# Altium PCB PCB.PcbDoc
Units mil, origin at the board's own origin, x right, y up, seen from the top; angles counter-clockwise.
Board outline 3935 x 2660 mil, 4 copper layers (TOP, GND, VCC, BOT), stack 23.756 mil thick; 87 components, 42 nets, 224 pads, 308 vias.
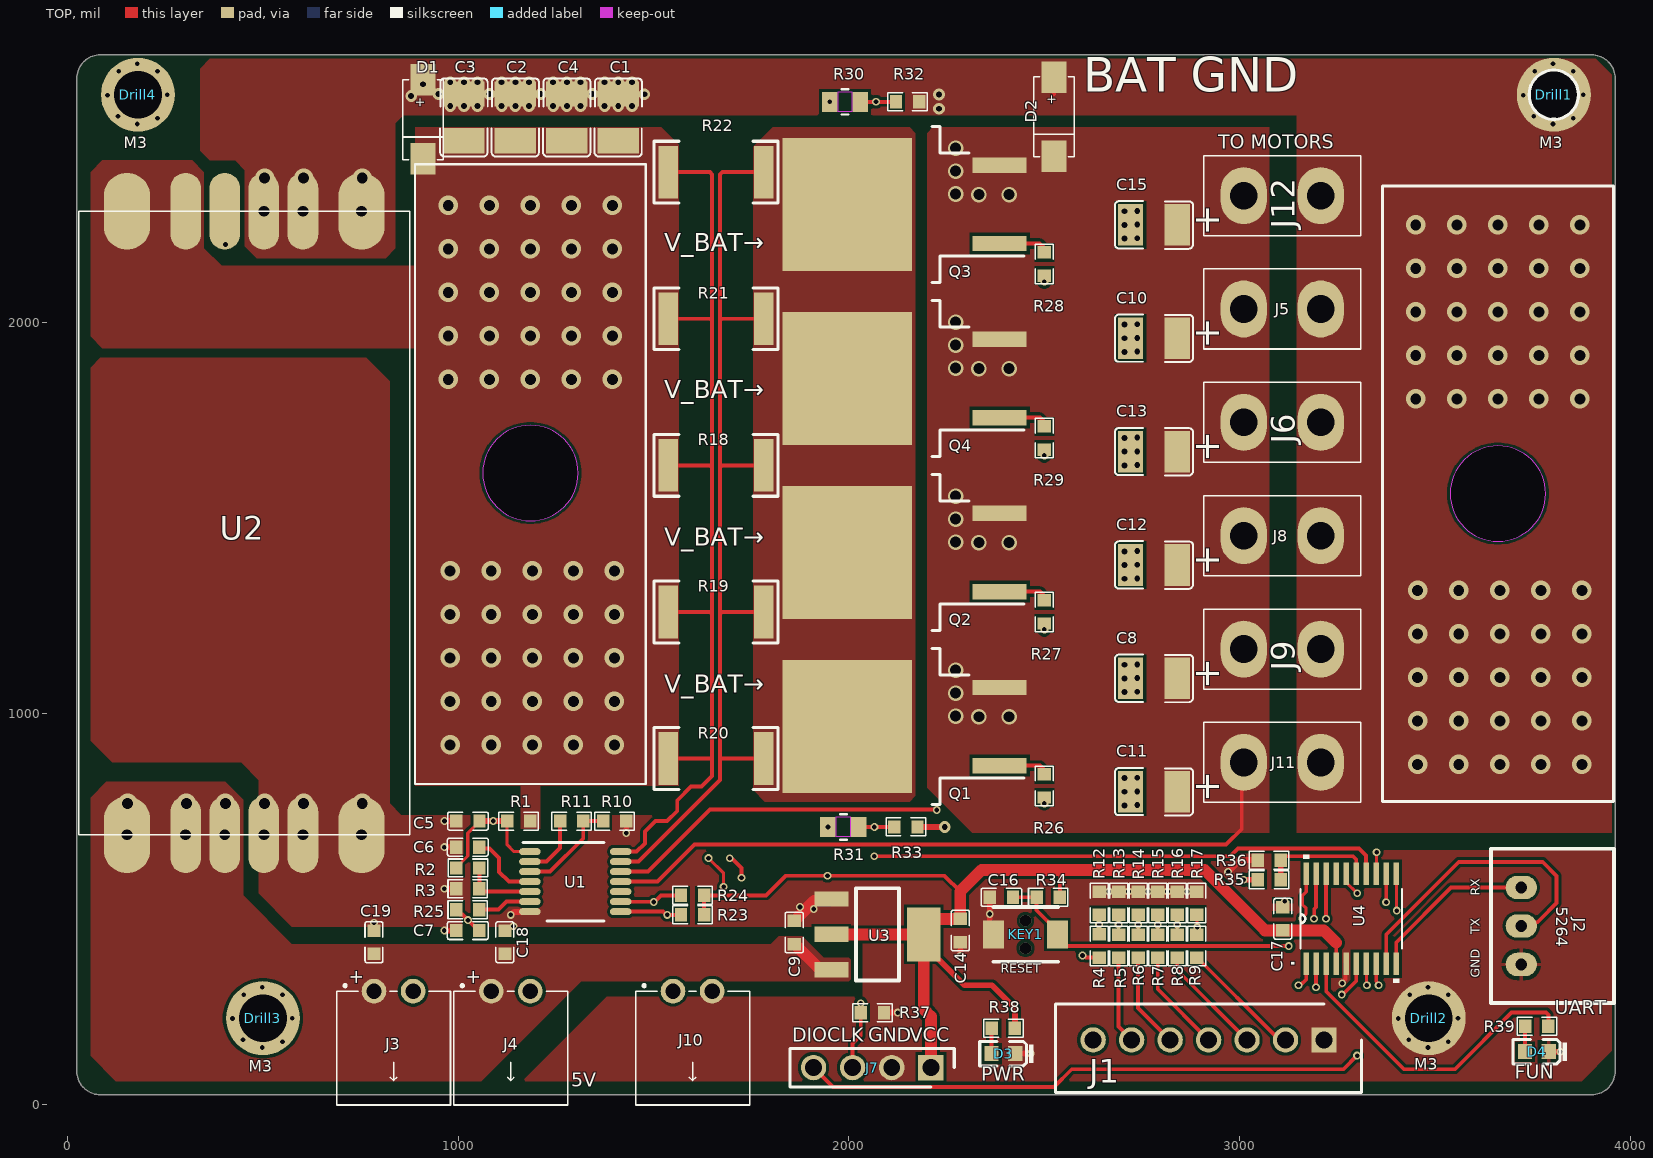
[diagram p0: TOP view]
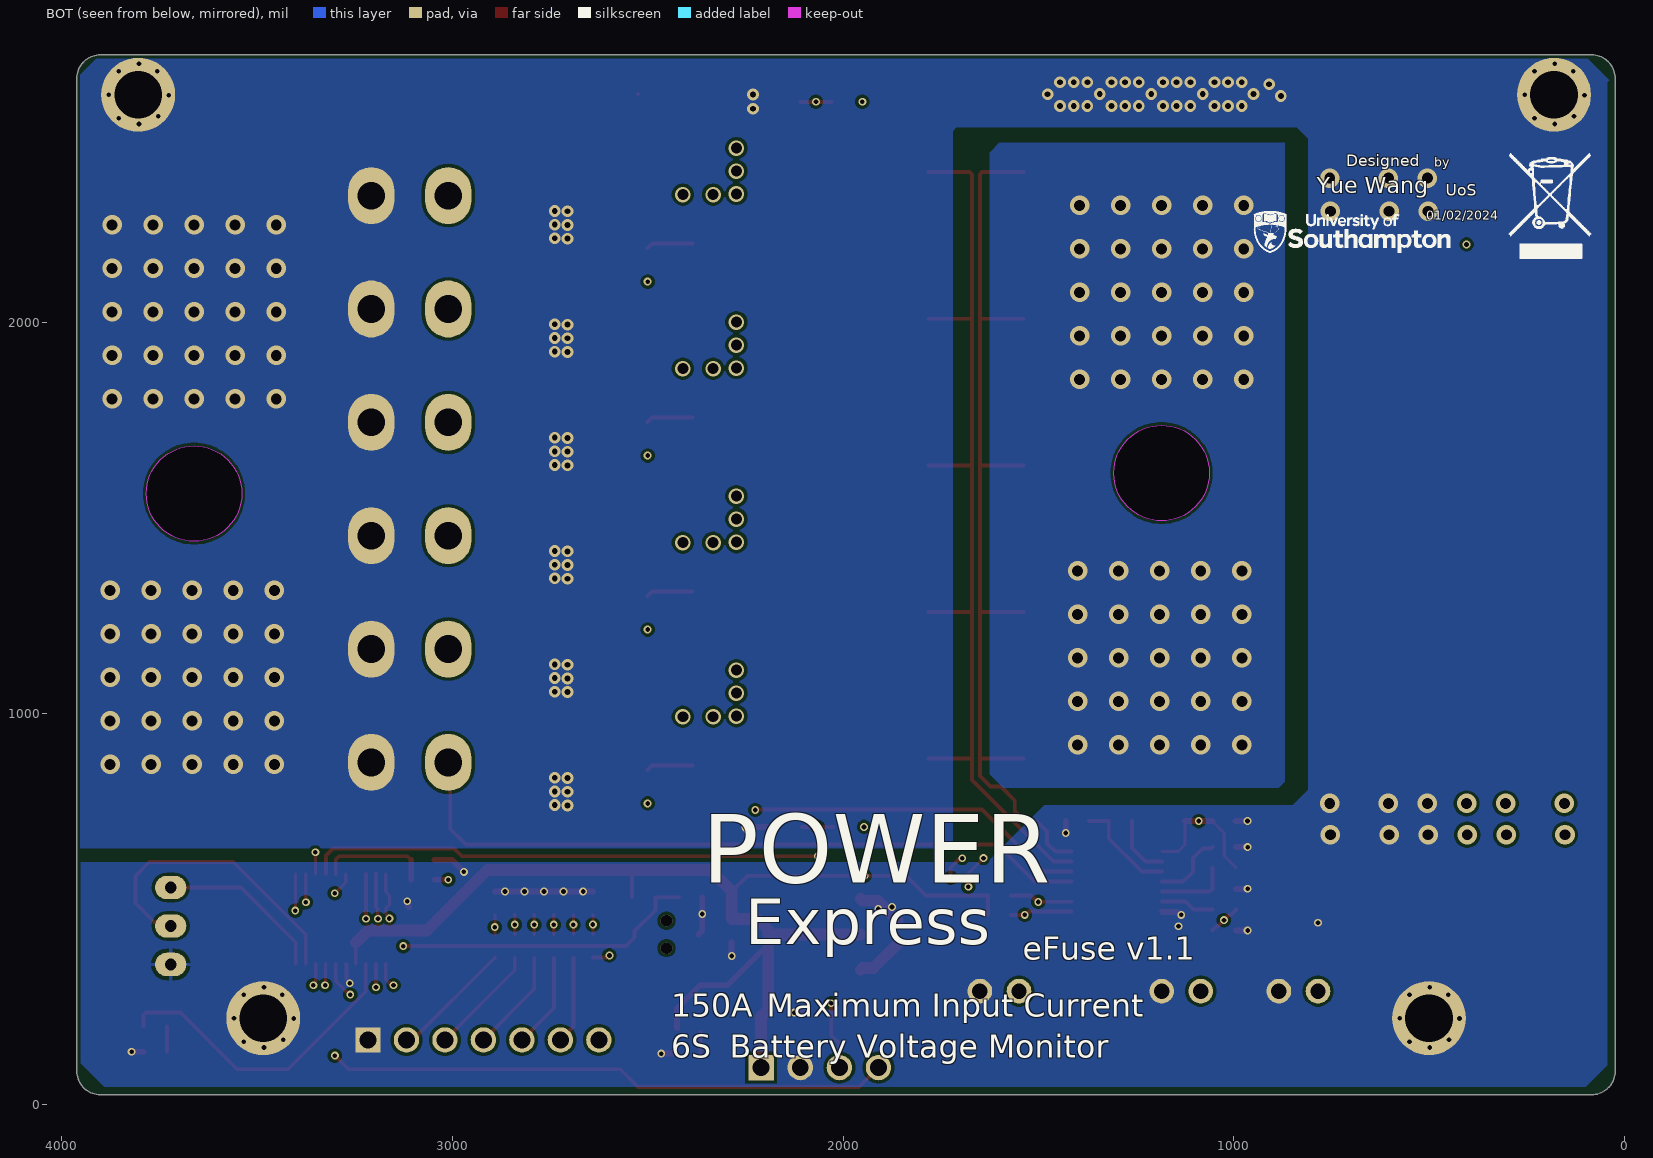
[diagram p1: BOT view, seen from below]
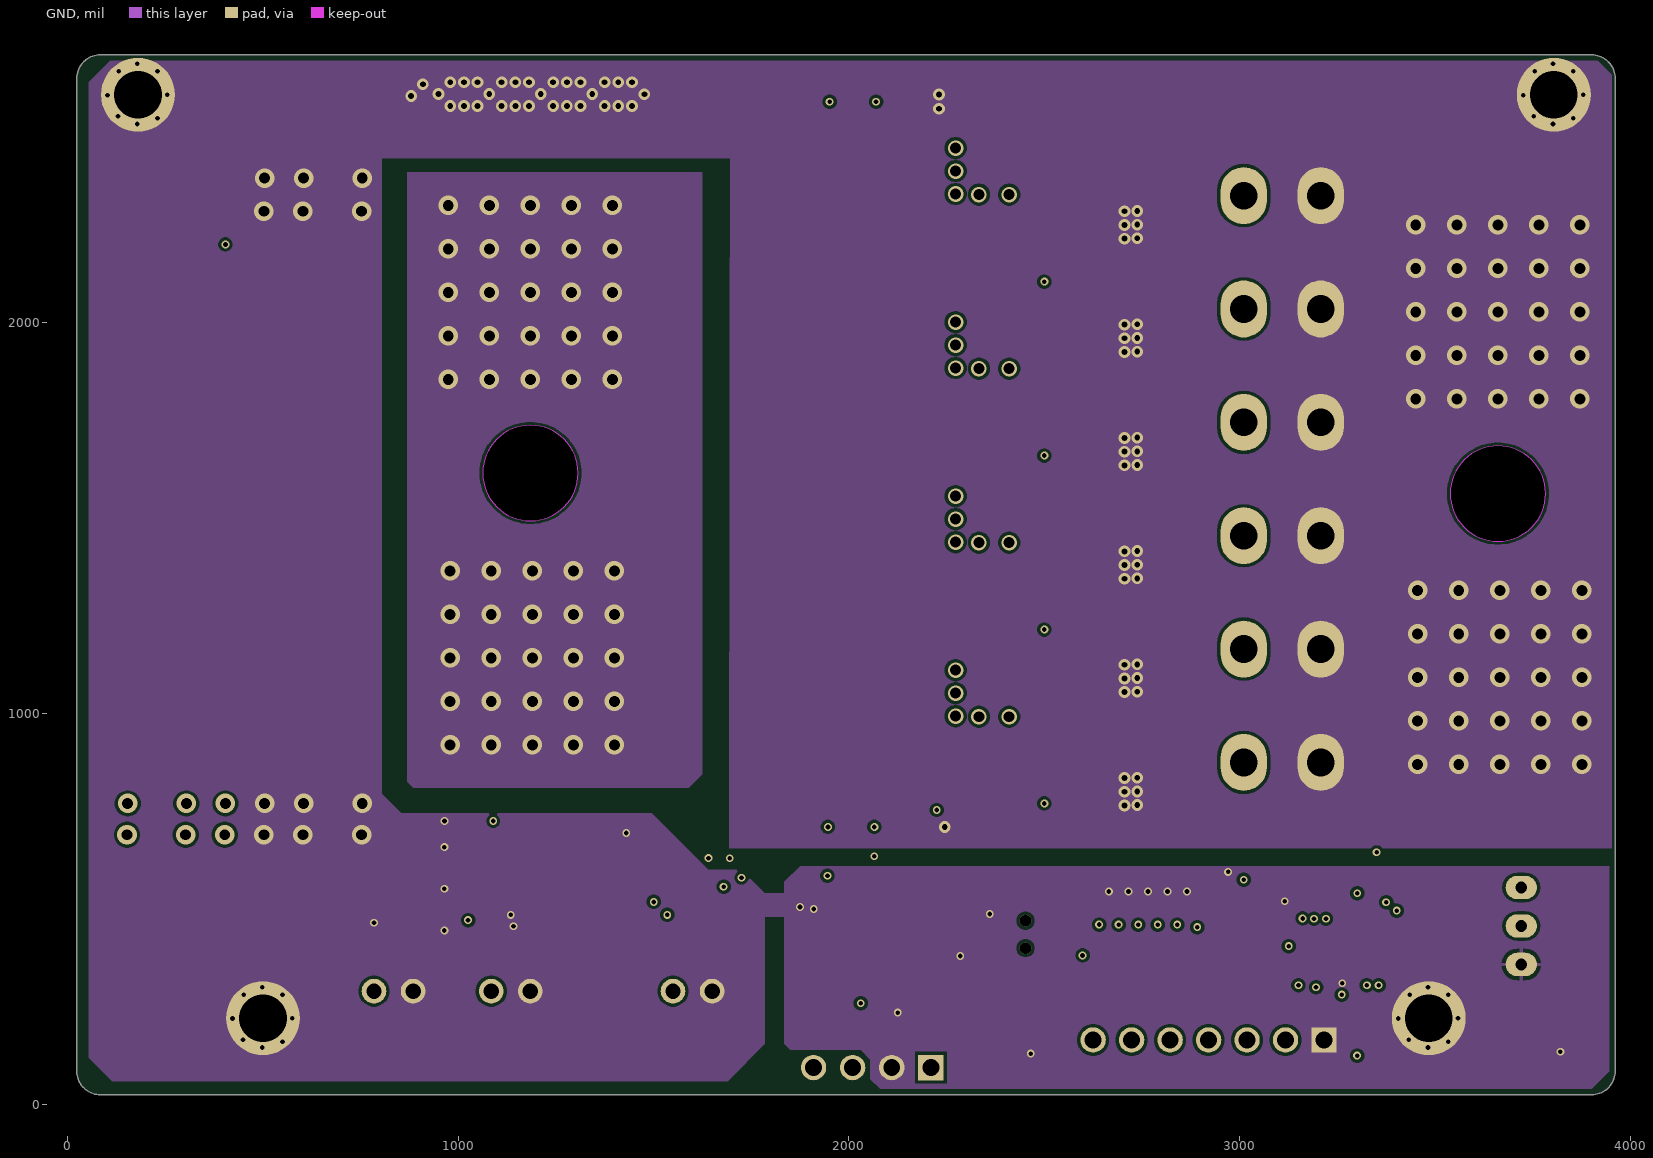
[diagram p2: GND]
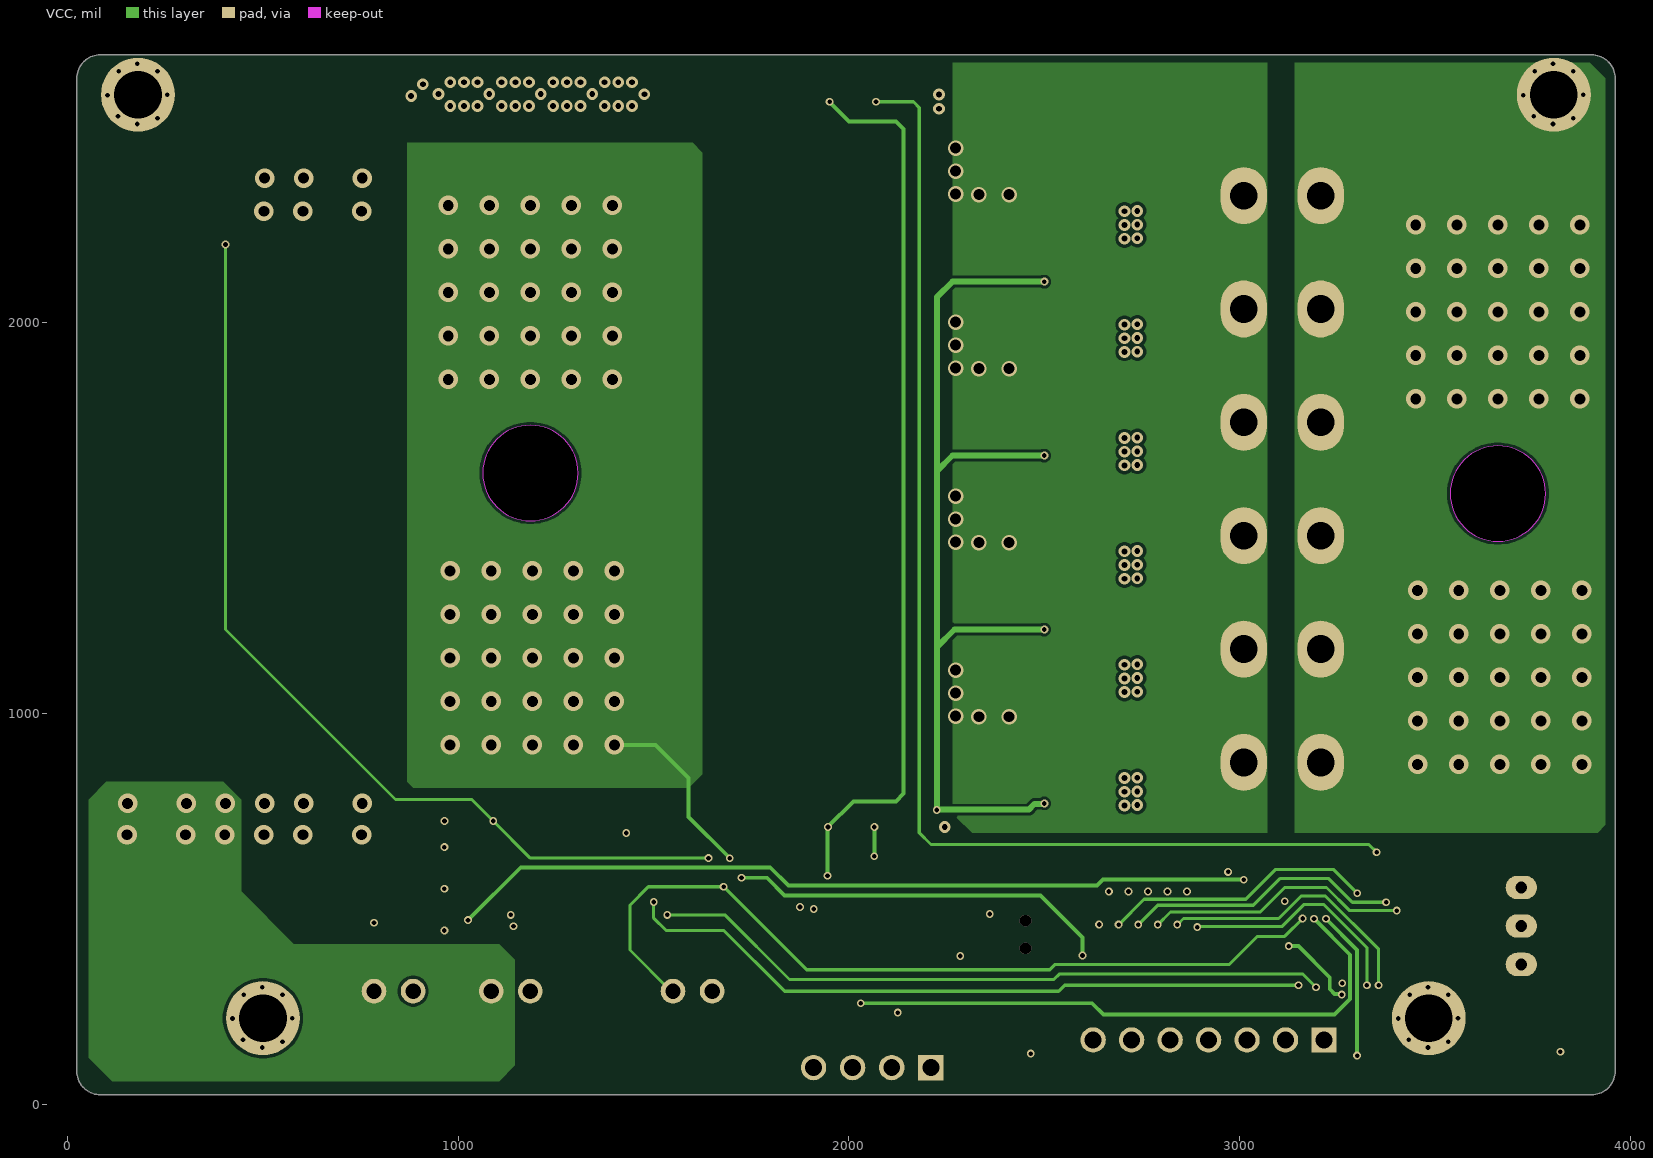
[diagram p3: VCC]
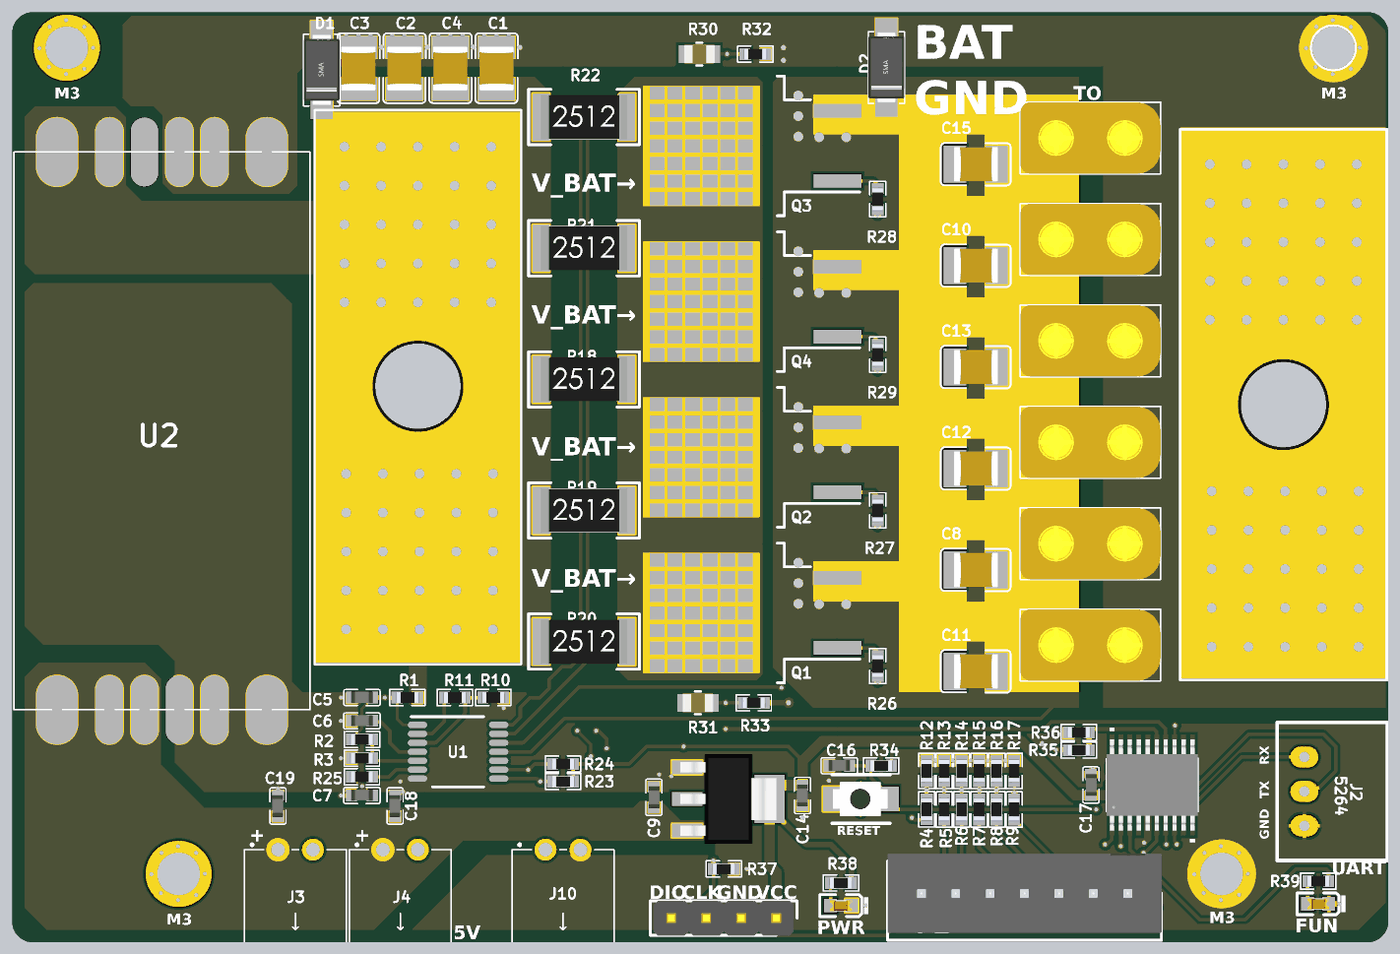
[diagram p4: 3D render of the assembled board from above, using the file's embedded part models]

## Layer stack, top to bottom
Top Solder: solder mask 0.4, Solder Resist, Dk 3.5
TOP: signal copper 1.4
Dielectric 2: prepreg 2.8, PP-006, Dk 4.1
GND: signal copper 1.378
Dielectric 1: dielectric 12.6, FR-4, Dk 4.8
VCC: signal copper 1.378
Dielectric 3: prepreg 2.8, PP-006, Dk 4.1
BOT: signal copper 1.4
Bottom Solder: solder mask 0.4, Solder Resist, Dk 3.5

## Board outline
25,84.24 25,2625 cw(c84.62,2625.38) 84.24,2685 3900,2685 cw(c3900.38,2625.38) 3960,2625.76 3960,85 cw(c3900.38,84.62) 3900.76,25 85,25 cw(c84.62,84.62)
cut-out: 3538.23,1562.66 ccw(c3660.28,1562.66) 3660.28,1440.61 ccw(c3660.28,1562.66) 3782.32,1562.66 ccw(c3660.28,1562.66) 3660.28,1684.71 ccw(c3660.28,1562.66)
cut-out: 1063.23,1615.28 ccw(c1185.28,1615.28) 1185.28,1493.23 ccw(c1185.28,1615.28) 1307.32,1615.28 ccw(c1185.28,1615.28) 1185.28,1737.32 ccw(c1185.28,1615.28)

## Design rules (kind name [scope] priority, off if disabled: settings)
BoardOutlineClearance [All] p1: gap=7.87 ignorepadtopadclearanceinfootprint=FALSE except(15.75: Arc-SplitBarrior Arc-SplitContinuation Track-SplitBarrior Track-SplitContinuation SMDPad-SplitBarrior SMDPad-SplitContinuation THPad-SplitBarrior THPad-SplitContinuation Via-SplitBarrior Via-SplitContinuation Fill-SplitBarrior Fill-SplitContinuation Poly-SplitBarrior Poly-SplitContinuation Region-SplitBarrior Region-SplitContinuation Text-SplitBarrior Text-SplitContinuation)
Clearance "Clearance Bottom Layer" [OnLayer('Bottom Layer')] p1: gap=8 ignorepadtopadclearanceinfootprint=TRUE except(10: Arc-Text Track-Text SMDPad-Text THPad-Text Via-Text Fill-Text Poly-Text Region-Text Text-Text)
Clearance "Clearance Top Layer" [OnLayer('Top Layer')] p2: gap=8 ignorepadtopadclearanceinfootprint=TRUE except(10: Arc-Text Track-Text SMDPad-Text THPad-Text Via-Text Fill-Text Poly-Text Region-Text Text-Text)
Clearance [All] p3: gap=7.87 ignorepadtopadclearanceinfootprint=FALSE except(3.5: Arc-Arc Arc-Track Arc-SMDPad Track-Track Track-SMDPad SMDPad-SMDPad; 5: Arc-Via Track-Via SMDPad-Via THPad-Via Via-Via; 10: Arc-Text Track-Text SMDPad-Text THPad-Text Via-Text Fill-Text Poly-Text Region-Text Text-Text)
HoleSize [All] p1: absolutevalues=TRUE maxlimit=248.03 minlimit=7.87 maxpercent=80.000 minpercent=20.000
MinimumAnnularRing [All] p1: minimumring=3
MinimumSolderMaskSliver [All] p1: minsoldermaskwidth=3.94
PlaneClearance [All] p1: clearance=50
PlaneConnect [All] p1: planeconnectstyle=Direct reliefexpansion=20 reliefentries=4 reliefconductorwidth=10 reliefairgap=10
PolygonConnect PolygonConnect_1 [All] p1: connectstyle=Direct reliefconductorwidth=30 reliefentries=4 polygonreliefangle="90 Angle" airgapwidth=10
RoutingCorners [All] p1: cornerstyle=Round minsetback=100 maxsetback=100
RoutingVias [All] p1: holewidth=19.68 width=39.37 viastyle="Through Hole" minholewidth=7.87 minwidth=17.72 maxholewidth=39.37 maxwidth=78.74
SilkToSilkClearance [All] p1: silktosilkclearance=3.94
SilkToSolderMaskClearance [IsPad] p1: minsilkscreentomaskgap=3.94 clearancetoexposedcopper=TRUE
SolderMaskExpansion [All] p1: expansion=4 istentingtop=FALSE
Width [All] p1: maxlimit=100 minlimit=3.5 preferedwidth=15
23 further rules are at their usual default settings.

## Classes and differential pairs
component class PMU: a C1 C2 C3 C4 C5 C6 C7 C8 C9 C10 C11 C12 C13 C14 C15 D1 D2 J1 Q1 Q2 Q3 Q4 R1 R2 R3 R4 R5 R6 R7 R8 R9 R10 R11 R12 R13 R14 R15 R16 R17 R18 R19 R20 R21 R22 R23 R24 R25 R26 R27 R28 R29 R30 R31 R32 R33 U1 U2 U3
component class MCU: a C16 C17 C18 C19 D3 D4 Drill1 Drill2 Drill3 Drill4 J2 J3 J4 J5 J6 J7 J8 J9 J10 J11 J12 KEY1 R34 R35 R36 R37 R38 R39 U4

## Components (designator, comment, footprint, x,y, rotation, side; value= is the part's Value field where it differs from the comment)
C1 "22uF" C1210 1410,2525 r270 top
C2 "22uF" C1210 1146.67,2525 r270 top
C3 "22uF" C1210 1015,2525 r270 top
C4 "22uF" C1210 1278.33,2525 r270 top
C5 "0.1uF" C0603 1025.33,725 r0 top
C6 "330pF" C0603 1025,658.33 r0 top
C7 "1.5nF" C0603 1025,445 r0 top
C8 "10uF" C1210 2780.28,1090 r0 top
C9 "1uF" C0603 1860,440 r270 top
C10 "10uF" C1210 2780.28,1960 r0 top
C11 "10uF" C1210 2780.28,800 r0 top
C12 "10uF" C1210 2780.28,1380 r0 top
C13 "10uF" C1210 2780.28,1670 r0 top
C14 "1uF" C0603 2285,445 r90 top
C15 "10uF" C1210 2780.28,2250 r0 top
C16 "0.1uF" C0603 2390,530 r0 top
C17 "0.1uF" C0603 3110,475 r270 top
C18 "0.1uF" C0603 1120,415 r90 top
C19 "0.1uF" C0603 785,415 r90 top
D1 "5.0SMDJ28A" SMA(DO-214AC) 910,2520 r90 top
D2 "MBRS3100T3G" SMA(DO-214AC) 2525,2526.93 r90 top
D3 "红灯 0603" 0603_LED_S1 2395,130 r180 top
D4 "红灯 0603" 0603_LED_S1 3759.69,135 r180 top
Drill1 "Drill_M3" Drill_M_3 3803.2,2583.05 r270 top
Drill2 "Drill_M3" Drill_M_3 3483.32,220.84 r270 top
Drill3 "Drill_M3" Drill_M_3 501.04,220.84 r270 top
Drill4 "Drill_M3" Drill_M_3 181.16,2583.05 r270 top locked
J1 "B7B-XH-A__LF__SN_" SHDR7W64P0X250_1X7_1990X575X700P 3215.28,165 r180 top
J2 "5263-3AW" 5264-3AW 3723.65,456.57 r270 top
J3 "XH_2.54mm_1x2P" XH2.54mm1x2P弯插 835,290 r0 top
J4 "XH_2.54mm_1x2P" XH2.54mm1x2P弯插 1135,290 r0 top
J5 "XT30UPB" XT30UPB 3010,2035 r90 top
J6 "XT30UPB" XT30UPB 3010,1745 r90 top
J7 "Header1x4" "Header 1x4p" 2209.48,94.4 r180 top
J8 "XT30UPB" XT30UPB 3010,1455 r90 top
J9 "XT30UPB" XT30UPB 3010,1165 r90 top
J10 "XH_2.54mm_1x2P" XH2.54mm1x2P弯插 1600,290 r0 top
J11 "XT30UPB" XT30UPB 3010,875 r90 top
J12 "XT30UPB" XT30UPB 3010,2325 r90 top
KEY1 "KEY_3*4" KEY_3*4 2370,435 r0 top
Q1 "CSD19536KTT" KTT0002A 2143.15,966.81 r180 top
Q2 "CSD19536KTT" KTT0002A 2143.15,1412.01 r180 top
Q3 "CSD19536KTT" KTT0002A 2143.15,2302.4 r180 top
Q4 "CSD19536KTT" KTT0002A 2143.15,1857.2 r180 top
R1 "178kΩ" R0603 1155.33,725 r0 top
R2 "5.49kΩ" R0603 1025,605 r180 top
R3 "10kΩ" R0603 1025,551.67 r0 top
R4 "68.1kΩ" R0603 2640,405.33 r270 top
R5 "68.1kΩ" R0603 2690,405 r270 top
R6 "68.1kΩ" R0603 2740,405 r270 top
R7 "68.1kΩ" R0603 2790,405 r270 top
R8 "68.1kΩ" R0603 2840,405 r270 top
R9 "68.1kΩ" R0603 2890,405 r270 top
R10 "28kΩ" R0603 1400.67,725 r180 top
R11 "56kΩ" R0603 1290.67,725 r180 top
R12 "10kΩ" R0603 2640,515 r270 top
R13 "10kΩ" R0603 2690,515 r270 top
R14 "10kΩ" R0603 2740,515 r270 top
R15 "10kΩ" R0603 2790,515 r270 top
R16 "10kΩ" R0603 2840,515 r270 top
R17 "10kΩ" R0603 2890,515 r270 top
R18 "1mΩ" 2512_R 1660,1635 r0 top
R19 "1mΩ" 2512_R 1660,1260 r0 top
R20 "1mΩ" 2512_R 1660,885 r0 top
R21 "1mΩ" 2512_R 1660,2010 r0 top
R22 "1mΩ" 2512_R 1660,2385 r0 top
R23 "470kΩ" R0603 1600,485 r180 top
R24 "470kΩ" R0603 1600,535 r180 top
R25 "1kΩ" R0603 1025,498.33 r0 top
R26 "10Ω" R0603 2500,815 r270 top
R27 "10Ω" R0603 2500,1260 r270 top
R28 "10Ω" R0603 2500,2150 r270 top
R29 "10Ω" R0603 2500,1705 r270 top
R30 "NTCS0805E3103JMT" NTCS0805_VIS 1990,2565 r180 top
R31 "NTCS0805E3103JMT" NTCS0805_VIS 1985.63,710 r180 top
R32 "10kΩ" R0603 2150,2565 r0 top
R33 "10kΩ" R0603 2145.63,710 r0 top
R34 "10k" R0603 2510,530 r0 top
R35 "10k" R0603 3075,575 r180 top
R36 "10k" R0603 3075,625 r0 top
R37 "10k" R0603 2060,235 r180 top
R38 "10k" R0603 2395,195 r180 top
R39 "10k" R0603 3759.69,200 r180 top
U1 "TPS2492PW" PW0014A_N 1300,570 r0 top
U2 "TPS5450_module" TPS5450_module 460,1505 r270 top
U3 "AMS1117-3.3" SOT-223 2073.11,437 r0 top
U4 "STM32C011F6P6" TSSOP20_STM 3285,475 r90 top

## Footprints (in the part's own frame and the unit in brackets; to place one, negate y for a bottom-side part, rotate by r counter-clockwise, add the part's x,y. Pads: shape width x height; smd on the part's side, far side on the other; paste and mask are expansions set on the pad)
0603_LED_S1 [mm]
  rect 0.93x0.98 smd: A(0.77,0) K(-0.77,0)
  silkscreen extent -1.98,-0.79 1.54,0.79, body extent -0.8,-0.4 0.8,0.4, height 0.6
2512_R [mm]
  rect 1.25x3.42 smd: 1(-3.1,0) 2(3.1,0)
  silkscreen extent -4.03,-2.01 4.02,2.01, body extent -3.16,-1.6 3.16,1.6, height 0.62
5264-3AW [mil]
  oval 60x80 hole 30: 1(-98.43,-3.65) 2(0,-3.65) 3(98.43,-3.65)
  silkscreen extent -197,-81 197,234
C0603 [mil]
  rect 31.73x34.02 smd mask+2.01: 1(-29.67,0) 2(29.67,0)
  silkscreen extent -52,-23 52,23, body extent -31,-15 31,16, height 18
C1210 [mm]
  rect 1.635x2.7 smd mask+0.051: 1(-1.517,0) 2(1.517,0)
  silkscreen extent -2.54,-1.55 2.54,1.55, body extent -1.57,-1.26 1.63,1.26, height 0.92
Drill_M_3 [mm]
  round 4.8 hole 3.1: 0(0,0)
"Header 1x4p" [mm]
  rect 1.65x1.65 hole 1.1: 1(0,0)
  round 1.65 hole 1.1: 2(2.54,0) 3(5.08,0) 4(7.62,0)
  silkscreen extent -1.52,-1.25 9.14,1.25, body extent -1.28,-1.27 8.9,1.27, height 8.6
KEY_3*4 [mm]
  rect 1.35x1.8 smd: 1(0,0) 2(4.15,0)
  silkscreen extent 0,-1.77 4.19,1.78, body extent 0.03,-1.25 4.03,1.25, height 1.6
KTT0002A [mm]
  rect 3.5x1 smd paste+0 mask+0.051: 1(-6.15,2.54) 3(-6.15,-2.54)
  rect 8.4x8.65 smd paste-4.2 mask+0.051: 2(3.75,0)
  silkscreen extent -7.75,-5.07 -1.78,5.07
NTCS0805_VIS [mm]
  rect 1x1.3 smd paste+0 mask+0: 1(-1,0) 2(1,0)
  TOP keep-out region: -0.449,-0.648 -0.449,0.648 0.449,0.648 0.449,-0.648
  silkscreen extent -0.22,-0.83 0.22,0.83, body extent -1.1,-0.7 1.1,0.7, height 0.94
PW0014A_N [mm]
  oval 1.4x0.45 smd paste+0 mask+0: 1(-2.95,1.95) 2(-2.95,1.3) 3(-2.95,0.65) 4(-2.95,0) 5(-2.95,-0.65) 6(-2.95,-1.3) 7(-2.95,-1.95) 8(2.95,-1.95) 9(2.95,-1.3) 10(2.95,-0.65) 11(2.95,0) 12(2.95,0.65) 13(2.95,1.3) 14(2.95,1.95)
  silkscreen extent -3.4,-2.55 1.85,2.55
R0603 [mil]
  rect 31.73x34.02 smd mask+2.01: 1(-29.67,0) 2(29.67,0)
  silkscreen extent -51,-23 50,23, body extent -37,-16 37,16, height 18
SHDR7W64P0X250_1X7_1990X575X700P [mm]
  rect 1.65x1.65 hole 1.1: 1(0,0)
  round 1.65 hole 1.1: 2(2.5,0) 3(5,0) 4(7.5,0) 5(10,0) 6(12.5,0) 7(15,0)
  silkscreen extent -2.45,-2.35 17.45,3.4, body extent -2.45,-2.88 17.45,2.88, height 7
SMA(DO-214AC) [mm]
  rect 2.046x1.62 smd mask+0.051: 1(-2.565,0) 2(2.565,0)
  silkscreen extent -2.62,-1.31 2.59,1.31, body extent -2.6,-1.3 2.6,1.3, height 2.1
SOT-223 [mm]
  rect 2.2x1 smd: 1(-3,2.249) 2(-3,-0.051) 3(-3,-2.351)
  rect 2.2x3.5 smd: 2(3,-0.051)
  silkscreen extent -1.4,-3.05 1.4,2.95, body extent -3.49,-3.29 3.49,3.19, height 1.64
TPS5450_module [mm]
  oval 5x3 smd mask+0.051: 1(-19.812,-7.792) 2(-19.812,7.448) 2(20.701,7.448) 4(20.701,-7.792)
  oval 5x2 smd mask+0.051: 1(-19.812,-3.982) 2(-19.812,1.098) 2(-19.812,3.638) 2(20.701,1.098) 2(20.701,3.638) 3(-19.812,-1.442) 4(20.701,-3.982) 4(20.701,-1.442)
  silkscreen extent -19.81,-10.92 20.69,10.58
TSSOP20_STM [mil]
  rect 58x14 smd paste-29 mask-29: 1(-115,115.16) 2(-115,89.57) 3(-115,63.98) 4(-115,38.39) 5(-115,12.8) 6(-115,-12.8) 7(-115,-38.39) 8(-115,-63.98) 9(-115,-89.57) 10(-115,-115.16) 11(115,-115.16) 12(115,-89.57) 13(115,-63.98) 14(115,-38.39) 15(115,-12.8) 16(115,12.8) 17(115,38.39) 18(115,63.98) 19(115,89.57) 20(115,115.16)
  silkscreen extent -164,-130 164,130, body extent -130,-130 130,130, height 47
XH2.54mm1x2P弯插 [mm]
  round 1.6 hole 1.001 mask+0.051: 1(-1.27,0) 2(1.27,0)
  silkscreen extent -3.7,-7.4 3.7,0.43, body extent -3.75,-7.39 3.75,0.33, height 5.9
XT30UPB [mm]
  oval 3.7x3 hole 1.8: 1(0,0) 2(0,-5)
  silkscreen extent -2.6,-7.6 2.6,2.6, body extent -2.6,-7.6 2.6,2.6, height 10.66

## Part data
C1 C2 C3 C4 C8 C9 C10 C11 C12 C13 C14 C15: library part Capacitor, "VJ1210Y104MXCAT"
C5 C6 C7 C16 C17 C18 C19: library part Capacitor
D1: library part Diode_Schottky
D2: library part Diode_Schottky, "Schottky Diodes & Rectifiers 3A 100V"
D3 D4: library part "0603 红灯", "发光二极管", Package=0603, SuppliersPartNumber=C2286, ComponentLink1Description=供应商链接, ComponentLink1URL=http://www.szlcsc.com/product/details_2659.html, Supplier=LC
J1: "Connector", Arrow Part Number="B7B-XH-A (LF)(SN)", Manufacturer_Name="JST (JAPAN SOLDERLESS TERMINALS)", Arrow Price/Stock=https://www.arrow.com/en/products/b7b-xh-a-lf-sn/jst-manufacturing, Datasheet Link=https://www.jst.com/wp-content/uploads/2021/01/eXH-new.pdf, Height=7mm, Manufacturer_Part_Number="B7B-XH-A (LF)(SN)"
J5 J6 J8 J9 J11 J12: "https://item.taobao.com/item.htm?abbucket=12&id=607162270928&ns=1&priceTId=2147810917158194959275132&sku_properties=1627207:45770027"
KEY1: "C707339"
Q1 Q2 Q3 Q4: library part NMOSFET, "100-V N-Channel NexFET™ Power MOSFET"
R1 R2 R3 R4 R5 R6 R7 R8 R9 R10 R11 R12 R13 R14 R15 R16 R17 R23 R24 R25 R26 R27 R28 R29 R32 R33 R34 R35 R36 R37 R38 R39: library part Resistor
R18 R19 R20 R21 R22: library part Resistor, "CHSA2512R0010F"
R30 R31: library part CMP-02404-000004-2, "THERMISTOR NTC 10KOHM 3570K 0805", Case Code (Imperial)=0805, Case Code (Metric)=2012, Max Operating Temperature=150°C, Max Power Dissipation=210mW, Min Operating Temperature=-40°C, Resistance=10kΩ, Tolerance=5%, Accuracy=3%, Case/Package=0805, Contact Plating=Tin, Depth=1.25mm, Height=950µm, Lead Free="Lead Free", Length=2mm, Mount="Surface Mount", NexarPartId=39723061, Number of Pins=2, Packaging="Cut Tape (CT)", Power Rating=210mW, Radiation Hardening=No, REACH SVHC=Unknown, RoHS=Compliant, Schedule B="8533400080, 8533400080", Termination=SMD/SMT
U1: "The TPS2492 and TPS2493 are easy-to-use, positive high voltage, 14-pin Hotswap Controllers that safely drive an external N-channel FET to control load current. The programmable power foldback protection ensures that the external FET operates inside its safe operating area (SOA) during overload conditions by controlling of power dissipation. The programmable current limit and fault timer ensure the supply, external FET, and load are not harmed by overcurrent. Features include inrush current limiting, controlled load turn-on, interfacing to down-stream DC-to-DC converters, and power feed protection. /  / The analog current monitor output provides a signal ready for sampling with an external A/D converter. /  / Additional features include programmable overvoltage and undervoltage shutdown, power-good for coordinating loads with inrush, and a fault indicator to indicate an over-current shutdown."
U2: "https://item.taobao.com/item.htm?id=678523742086&spm=a1z0d.6639537&sku_properties=1627207:1665065280"
U3: "C347222"
U4: "No Description Available", Mfr_Name=STMicroelectronics, Copyright="Copyright (C) 2024 Ultra Librarian. All rights reserved.", Manufacturer_Part_Number=STM32C011F6P6, RefDes=RefDes, Type=DEV

## Via types
v1: diameter 50, hole 28, TOP to BOT, tented both sides, 118 vias
v2: diameter 20, hole 12, TOP to BOT, tented both sides, 98 vias
v3: diameter 30, hole 15, TOP to BOT, tented both sides, 70 vias
v4: diameter 40, hole 28, TOP to BOT, tented both sides, 20 vias
v5: diameter 29.53, hole 29.53, TOP to BOT, tented both sides, 2 vias

## Nets (pads, with @x,y where several pads share a name; then routed paths per layer and width w, separated by ;. In a path a pad name is that pad's centre, name@x,y a point inside that pad or via, vN(x,y) a via of type N, cw(c..) or ccw(c..) an arc to the next point about the centre after c; other vN are vias at no path point)
+5: C9.2 C18.1 C19.1 J3.1 J4.1 U2.4 U3.3 | length 122.3
  TOP w30: C9.2 1861.14,410.33 1922.34,349.13 1950.31,349.13 U3.3
  other v1: 153.23,690 303.23,690 403.23,690 155,770 305,770 405,770
ADC_IN0: R9.1 R17.2 U4.7 | length 706.9
  TOP w8: R9.1 2890.85,435.52 v2(2890.85,453.65) 2890.85,484.48 R17.2 ; U4.7 3324.19,359.19 3324.19,305.81 v2(3325,305)
  VCC w8: v2(2890.85,453.65) 2892.2,455 3107.25,455 3163.38,511.13 3215.37,511.13 3325,401.5 v2(3325,305)
ADC_IN1: R8.1 R16.2 U4.8 | length 802.2
  TOP w8: R8.1 v2(2840,460) R16.2 ; U4.8 3348.98,314.27 3355,308.25 v2(3355,305)
  VCC w8: v2(2840,460) 2855.93,475.93 3099.17,475.93 3156.65,533.4 3218.85,533.4 3355,397.26 v2(3355,305)
ADC_IN2: R7.1 R15.2 U4.11 | length 820.2
  TOP w8: R7.1 v2(2790,460) R15.2 ; U4.11 3400.7,589.46 3400.7,496.51 v2(3401.24,495.97)
  VCC w8: v2(2790,460) 2822.47,492.47 3052.47,492.47 3115,555 3221.87,555 3280.9,495.97 v2(3401.24,495.97)
ADC_IN3: R6.1 R14.2 U4.12 | length 831.4
  TOP w8: R6.1 v2(2740,460) R14.2 ; v2(3374.23,517.41) 3374.4,517.58 3374.4,589.83 U4.12
  VCC w8: v2(2740,460) 2789.68,509.68 3034.32,509.68 3102.42,577.78 3227.62,577.78 3287.98,517.41 v2(3374.23,517.41)
ADC_IN4: R5.1 R13.2 U4.16 | length 806.5
  TOP w8: R5.1 v2(2690,460) R13.2 ; U4.16 3272.2,568 3300.03,540.17 v2(3300.33,540.17)
  VCC w8: v2(2690,460) 2754.87,524.87 3015.32,524.87 3091.82,601.37 3239.13,601.37 v2(3300.33,540.17)
ADC_IN5: R4.1 R12.2 | length 50.3
  TOP w8: R4.1 R12.2
  other v2: 2640,460.17
ADC_TEMP1: R30.1 R32.1 U4.13 | length 3298
  TOP w8: U4.13 3349.49,590.51 3349.49,644.49 v2(3350,645)
  TOP w10: R30.1 v2(2069.41,2565) R32.1@2109.45,2565
  VCC w8: v2(2069.41,2565) 2165,2565 2180,2550 2180,695 2210,665 3330,665 v2(3350,645)
ADC_TEMP2: R31.1 R33.1 U4.14 | length 1475.9
  TOP w10: R31.1 v2(2065.04,710) R33.1@2105.08,710 ; v2(2065,635) 2975,635 2995,655 3304.79,655 3323.09,636.7 3323.09,590.3 U4.14
  VCC w10: v2(2065,635) v2(2065.04,710)
eFuse_ENA: C5.2 J10.1 R1.1 R2.2 U1.1 U2.3 U4.20 | length 5170.6
  TOP w8: R2.2 995.33,606.14 1025,635.81 1025,693.86 1055,723.86 C5.2 ; R1.1 1125.67,664.33 1143.23,646.77 U1.1 ; v2(1640.9,630.22) 1679.53,591.59 v2(1679.53,557.08) ; v2(3160.56,475.88) 3160.56,479.13 3169.53,488.1 3169.53,501.88 3160,511.41 3160,534.25 3169.84,544.09 U4.20
  TOP w15: C5.2 v2(1090.33,725) R1.1
  VCC w8: v2(405,2200) 405,1215 840,780 1035.33,780 v2(1090.33,725) 1185.12,630.22 v2(1640.9,630.22) ; J10.1 1545,290 1440,395 1440,510 1487.08,557.08 v2(1679.53,557.08) 1892.08,344.53 2513.72,344.53 2527.62,358.43 2973.43,358.43 3045,430 3114.67,430 v2(3160.56,475.88)
FLT_N: R24.2 U1.9 U4.1 | length 2002.4
  TOP w10: U1.9 1416.46,518.5 1500.2,518.5 v2(1500.52,518.17) 1502.23,518.17 1519.05,535 R24.2 ; v2(3150,305) 3151.91,306.91 3156.91,306.91 3169.84,319.84 U4.1
  VCC w8: v2(1500.52,518.17) 1500.52,476.82 1532.34,445 1679.98,445 1835.45,289.53 2536.5,289.53 2551.97,305 v2(3150,305)
GND: C1.1 C2.1 C3.1 C4.1 C5.1 C6.1 C7.1 C8.1 C9.1 C10.1 C11.1 C12.1 C13.1 C14.1 C15.1 C16.1 C17.1 C18.2 C19.2 D1.2 D2.2 D3.K D4.K Drill1.0 Drill2.0 Drill3.0 Drill4.0 J1.1 J2.3 J3.2 J4.2 J5.2 J6.2 J7.2 J8.2 J9.2 J10.2 J11.2 J12.2 KEY1.1 R3.1 R10.1 R12.1 R13.1 R14.1 R15.1 R16.1 R17.1 R32.2 R33.2 R36.1 R37.1 U1.7 U2.2 U3.1 U4.5 | length 1029.2
  TOP w10: v2(3261.93,309.96) 3261.93,312.66 3270.2,320.93 3270.2,358 U4.5
  TOP w15: v2(965,445) C7.1 ; v2(965,551.67) R3.1 ; v2(965,658.33) C6.1 ; v2(965.33,725) C5.1 ; v2(1135,485) 1136.35,485 1144.06,492.71 1183.34,492.71 U1.7 ; v2(1430.33,694.67) R10.1 ; R37.1 v2(2125,235) ; R33.2@2186.18,710 v3(2245,710) ; v2(2285,380) C14.1 ; C16.1 2360.33,444.67 KEY1.1 ; D3.K v2(2465,130) ; R12.1 R13.1 R14.1 R15.1 R16.1 R17.1 ; v2(2970,595) 3000,625 R36.1 ; C17.1 3114.04,508.71 3114.04,519.04 v2(3115,520) ; D4.K v2(3820,135)
  TOP w30: C9.1@1860.87,470.53 1862.01,470.53 1862.01,471.67 1911.2,520.87 1950.31,520.87 U3.1
  other v1: 503.23,690 603.23,690 753.23,690 505,770 605,770 755,770 3455,870 3560,870 3665,870 3770,870 3875,870 3455,981.25 3560,981.25 3665,981.25 3770,981.25 3875,981.25 3455,1092.5 3560,1092.5 3665,1092.5 3770,1092.5 3875,1092.5 3455,1203.75 3560,1203.75 3665,1203.75 3770,1203.75 3875,1203.75 3455,1315 3560,1315 3665,1315 3770,1315 3875,1315 3450,1805 3555,1805 3660,1805 3765,1805 3870,1805 3450,1916.25 3555,1916.25 3660,1916.25 3765,1916.25 3870,1916.25 3450,2027.5 3555,2027.5 3660,2027.5 3765,2027.5 3870,2027.5 3450,2138.75 3555,2138.75 3660,2138.75 3765,2138.75 3870,2138.75 3450,2250 3555,2250 3660,2250 3765,2250 3870,2250 503.23,2285 603.23,2285 753.23,2285 505,2370 605,2370 755,2370
  other v2: 499.04,145.84 3481.32,145.84 551.04,160.84 3533.32,160.84 450.04,165.84 3432.32,165.84 423.04,219.84 3405.32,219.84 576.04,220.84 3558.32,220.84 452.04,280.84 551.04,280.84 3434.32,280.84 3533.32,280.84 499.04,299.84 3481.32,299.84 1141.92,455.83 785,465 2360.33,487.33 1910,500 1875,505 2665,544.67 2715,544.67 2765,544.67 2815,544.67 2865,544.67 179.16,2508.05 3801.2,2508.05 231.16,2523.05 3853.2,2523.05 130.16,2528.05 3752.2,2528.05 103.16,2582.05 3725.2,2582.05 256.16,2583.05 3878.2,2583.05 132.16,2643.05 231.16,2643.05 3754.2,2643.05 3853.2,2643.05 179.16,2662.05 3801.2,2662.05
  other v3: 2705,765 2737.71,765.82 2705,800 2737.71,800.82 2705,835 2737.71,835.82 2705,1055 2737.71,1055.82 2705,1090 2737.71,1090.82 2705,1125 2737.71,1125.82 2705,1345 2737.71,1345.82 2705,1380 2737.71,1380.82 2705,1415 2737.71,1415.82 2705,1635 2737.71,1635.82 2705,1670 2737.71,1670.82 2705,1705 2737.71,1705.82 2705,1925 2737.71,1925.82 2705,1960 2737.71,1960.82 2705,1995 2737.71,1995.82 2705,2215 2737.71,2215.82 2705,2250 2737.71,2250.82 2705,2285 2737.71,2285.82 2230.55,2547.23 980,2554.45 1015,2554.45 1050,2554.45 1111.67,2554.45 1146.67,2554.45 1181.67,2554.45 1243.33,2554.45 1278.33,2554.45 1313.33,2554.45 1375,2554.45 1410,2554.45 1445,2554.45 880,2580 2230.4,2583.49 1476.67,2584.45 950,2585 1080,2585 1211.67,2585 1343.33,2585 910,2610 980,2615 1015,2615 1050,2615 1111.67,2615 1146.67,2615 1181.67,2615 1243.33,2615 1278.33,2615 1313.33,2615 1375,2615 1410,2615 1445,2615
IMON: C7.2 R25.1 R35.2 | length 2183.6
  TOP w10: R25.1 995.33,497.19 1006.2,486.33 1011.1,486.33 1040.42,457.01 1043.8,457.01 1054.67,446.14 C7.2
  TOP w15: v2(3010,575) R35.2
  VCC w10: v2(1025.76,471.67) 1160.48,606.39 1798.61,606.39 1845,560 2635,560 2650,575 v2(3010,575)
NetC6_2: C6.2 U1.4 | length 186.3
  TOP w10: C6.2 1058,655 1080,655 1105,630 1105,595 1130,570 U1.4
NetC16_2: C16.2 KEY1.2 R34.1 U4.6 | length 1087
  TOP w10: C16.2 R34.1 2480.33,496.91 2533.39,443.86 KEY1.2 2533.39,426.57 2554.96,405 v2(3125,405) ; v2(3260.53,281.05) 3263.23,281.05 3297.8,315.61 U4.6
  VCC w10: v2(3125,405) 3150,405 3230,325 3230,295 3242.04,282.96 3258.61,282.96 v2(3260.53,281.05)
NetD3_A: D3.A R38.2 | length 65
  TOP w10: D3.A@2365,120.33 R38.2@2365,185.32
NetD4_A: D4.A R39.2 | length 65.3
  TOP w10: D4.A 3729.37,199.35 R39.2
NetJ1_2: J1.2 R9.2 | length 314
  TOP w10: R9.2 2891.14,375.33 3090.96,175.52 3106.33,175.52 J1.2
NetJ1_3: J1.3 R8.2 | length 284.2
  TOP w10: R8.2 2840,343.43 J1.3
NetJ1_4: J1.4 R7.2 | length 264.2
  TOP w10: R7.2 2790,295 J1.4
NetJ1_5: J1.5 R6.2 | length 244.1
  TOP w10: R6.2 2740,246.57 J1.5
NetJ1_6: J1.6 R5.2 | length 224.1
  TOP w10: R5.2 2690,199 2723.15,165.85 J1.6
NetQ1_1: Q1.1 R26.1 | length 119.4
  TOP w10: Q1.1 2488.74,866.81 R26.1@2500,855.55
NetQ1_2: Q1.2 Q2.2 Q3.2 Q4.2 R18.2 R19.2 R20.2 R21.2 R22.2 U1.13 | length 2458.4
  TOP w10: U1.13 1461.18,621.18 1670,830 1670,885 ; R20.2 1670,885 ; R19.2 1675,1260 1670,1255 ; R18.2 1675,1635 1670,1630 ; R21.2 1675,2010 1670,2005 ; R22.2 1675.86,2385 1670,2379.14 1670,2005 ; 1670,885 1670,1255 ; 1670,1255 1670,1630 ; 1670,1630 1670,2005
NetQ2_1: Q2.1 R27.1 | length 119.5
  TOP w10: Q2.1 2488.54,1312.01 R27.1@2500,1300.55
NetQ3_1: Q3.1 R28.1 | length 119.6
  TOP w10: Q3.1 2488.15,2202.4 R28.1@2500,2190.55
NetQ4_1: Q4.1 R29.1 | length 119.6
  TOP w10: Q4.1 2488.35,1757.2 R29.1@2500,1745.55
NetR2_1: R2.1 R3.2 U1.5 | length 185.5
  TOP w10: R2.1 R3.2 1061.92,544.41 U1.5
NetR10_2: R10.2 R11.1 U1.3 | length 266.9
  TOP w10: U1.3 1235.59,595.59 1320.33,680.33 R11.1 R10.2
NetR11_2: R11.2 U1.2 | length 160.6
  TOP w10: U1.2 1226.18,621.18 1261,656 R11.2
NetR25_2: R25.2 U1.6 | length 137.7
  TOP w10: R25.2 1103.33,498.33 1123.82,518.82 U1.6
NetR26_2: R26.2 R27.2 R28.2 R29.2 U1.12 | length 3345.8
  TOP w10: U1.12 1485.59,595.59 1644.96,754.96 2223.18,754.96 v2(2224.84,753.3)
  VCC w15: v2(2224.84,753.3) v2@2225,753.46 ; v2(2500,770) 2499.04,769.04 2474.89,769.04 2460,754.15 2225.69,754.15 v2@2225,753.46 ; v2(2500,1215) 2270,1215 2225,1170 ; v2(2500,1660) 2265,1660 2225,1620 ; v2(2500,2105) 2265,2105 2225,2065 2225,1620 ; v2@2225,753.46 2225,1170 ; 2225,1170 2225,1620
NetR35_1: R35.1 R36.2 U4.15 | length 287.7
  TOP w10: R36.2 3114.67,635 3290,635 3297.79,627.21 U4.15
  TOP w15: R35.1 R36.2
NetR39_1: R39.1 U4.3 | length 813.4
  TOP w10: U4.3 3221.02,288.98 3420,90 3550,90 3695,235 3783.49,235 3789.35,229.14 R39.1
PG_N: R23.2 U1.8 U4.2 | length 1966
  TOP w10: U1.8 1524.14,493.23 1532.37,485 v2(1535,485) R23.2 ; v2(3195,300) 3195.22,300.22 3195.22,359.78 U4.2
  VCC w8: v2(1535,485) 1682.4,485 1847.87,319.53 2524.08,319.53 2538.06,333.52 3161.48,333.52 v2(3195,300)
SWCLK: J7.3 R37.2 U4.19 | length 1813.8
  TOP w10: J7.3 2009.48,155.7 2030.33,176.56 R37.2 ; R37.2@2030.37,235.03 v2(2030.37,258.85) ; v2(3189.63,475.33) 3190.34,476.04 3190.34,500.33 3195.34,505.33 3195.34,589.91 U4.19
  VCC w10: v2(2030.37,258.85) 2622.11,258.85 2650.96,230 3241.93,230 3281.93,270 3281.93,383.04 v2(3189.63,475.33)
SWDIO: J7.4 U4.18 | length 1942.5
  TOP w10: J7.4 1958.88,45 2525,45 2570,90 3265,90 v2(3300,125) ; v2(3220.24,475.06) 3220.63,475.45 3220.63,589.61 U4.18
  VCC w10: v2(3220.24,475.06) 3300,395.3 v2(3300,125)
UART_RX: J2.1 U4.10 | length 432.7
  TOP w10: U4.10 3400.16,414.84 3540.31,555 J2.1
UART_TX: J2.2 U4.9 | length 785.5
  TOP w10: U4.9 3374.57,434.57 3560,620 3775,620 3810,585 3810,515 3768.48,473.48 3761.14,466.14 3729.57,466.14 J2.2
VBAT_IN: C1.2 C2.2 C3.2 C4.2 D1.1 R1.2 R4.2 R18.1 R19.1 R20.1 R21.1 R22.1 U1.14 U2.1 | length 4022.2
  TOP w10: U1.14 1456.77,646.77 1478.03,668.03 1478.03,698.03 1505,725 1535,725 1560.83,750.83 1560.83,778.04 1595.9,813.11 1623.11,813.11 1650,840 1650,885 ; R20.1 1650,885 ; R19.1 1645,1260 1650,1255 ; R18.1 1645,1635 1650,1630 ; R21.1 1645,2010 1650,2005 ; R22.1 1644.14,2385 1650,2379.14 1650,2005 ; v2(1695,630) 1700,630 1725,605 v2(1725,580) ; v2(2597.7,381.23) 2600.41,381.23 2605.97,375.67 R4.2 ; 1650,885 1650,1255 ; 1650,1255 1650,1630 ; 1650,1630 1650,2005
  VCC w10: v1(1400,920) 1505,920 1590,835 1590,735 v2(1695,630) ; v2@1724.25,580.75 v2(1725,580) 1790,580 1835,535 2490,535 2597.7,427.3 v2(2597.7,381.23)
  other v1: 980,920 1085,920 1190,920 1295,920 980,1031.25 1085,1031.25 1190,1031.25 1295,1031.25 1400,1031.25 980,1142.5 1085,1142.5 1190,1142.5 1295,1142.5 1400,1142.5 980,1253.75 1085,1253.75 1190,1253.75 1295,1253.75 1400,1253.75 980,1365 1085,1365 1190,1365 1295,1365 1400,1365 975,1855 1080,1855 1185,1855 1290,1855 1395,1855 975,1966.25 1080,1966.25 1185,1966.25 1290,1966.25 1395,1966.25 975,2077.5 1080,2077.5 1185,2077.5 1290,2077.5 1395,2077.5 975,2188.75 1080,2188.75 1185,2188.75 1290,2188.75 1395,2188.75 975,2300 1080,2300 1185,2300 1290,2300 1395,2300
VBAT_OUT: C8.2 C10.2 C11.2 C12.2 C13.2 C15.2 D2.1 J5.1 J6.1 J8.1 J9.1 J11.1 J12.1 Q1.3 Q2.3 Q3.3 Q4.3 U1.11 | length 1838.4
  TOP w10: U1.11 1510,570 1605,665 2965,665 3005,705 3005,828.62 3050,873.62 J11.1@3050,880
  other v4: 2332.5,991.91 2410,991.91 2272.95,993.41 2272.95,1052.16 2272.95,1110.91 2332.5,1437.11 2410,1437.11 2272.95,1438.6 2272.95,1497.35 2272.95,1556.1 2332.5,1882.3 2410,1882.3 2272.95,1883.8 2272.95,1942.55 2272.95,2001.3 2332.5,2327.5 2410,2327.5 2272.95,2329 2272.95,2387.75 2272.95,2446.5
VCC: C14.2 C17.2 J7.1 R23.1 R24.1 R30.2 R31.2 R34.2 R38.1 U3.2 U4.4 | length 5324.9
  TOP w10: R23.1 R24.1 1787.77,535 1837.77,585 2245,585 2285,545 ; R34.2 2539.67,599.67 2540,600 ; U4.4 3246.61,413.39
  TOP w15: U3.2@2191.22,435 2191.22,409.41 2227.03,373.6 2295.63,305 2365.88,305 2424.67,246.21 R38.1
  TOP w30: U3.2@1955,435 2191.22,435 2191.22,446.36 2219.53,474.67 C14.2 2285,545 2340,600 2540,600 2909.67,600 3064.33,445.33 C17.2 3214.67,445.33 3246.61,413.39 ; U3.2@2191.22,409.41 2191.22,243.78 2210,225 2210,94.92 J7.1
  VCC w10: v2(1945,585) 1945.63,585.63 1945.63,709.37 2011.26,775 2120,775 2140,795 2140,2495 2120,2515 2000.63,2515 v2(1950.63,2565)
  other v2: 1946.26,710
pads on no net: J1.7 U1.10 U4.17
copper on no net:
  other v5: 2451.69,400 2451.69,470

## Polygon pours and split planes (outlines as drawn)
GND on TOP "GND_L01_P055" (solid, remove dead copper, pour order 55): 1165,60 1380,275 2035,275 2035,455 575,455 490,540 490,830 445,875 115,875 60,930 60,1885 85,1910 765,1910 825,1850 825,770 855,740 1830,740 1920,650 3950,650 3955,645 3955,140 3875,60
VBAT_OUT on TOP "VBAT_OUT_L01_P002" (solid, remove dead copper, pour order 2): 2215,2500 3075,2500 3075,695 2315,695 2200,810 2200,2485
VBAT_IN on TOP "VBAT_IN_L01_P000" (solid, remove dead copper, pour order 0): 1520,2500 1565,2455 1565,815 890,815 890,2500
+5 on TOP "+5_L01_P048" (solid, remove dead copper, pour order 48): 100,825 405,825 450,780 450,535 575,410 1800,410 1820,430 1880,430 1935,375 2000,375 2005,370 2005,320 2000,315 1900,315 1315,315 1060,60 665,60 125,60 60,125 60,785
GND on TOP "GND_L01_P046" (solid, remove dead copper, pour order 46): 860,2675 365,2675 340,2650 340,2440 365,2415 430,2415 455,2390 455,2195 485,2165 815,2165 840,2190 840,2510 860,2530
VBAT_IN on TOP "VBAT_IN_L01_P045" (solid, remove dead copper, pour order 45): 910,2145 395,2145 350,2190 350,2385 320,2415 90,2415 60,2385 60,1965 90,1935 910,1935
NetQ1_2 on TOP "NETQ1_2_L01_P001" (solid, remove dead copper, pour order 1): 1755,2450 1805,2500 2155,2500 2170,2485 2170,790 2155,775 1785,775 1755,805
GND on TOP "GND_L01_P003" (solid, remove dead copper, pour order 3): 870,2555 950,2555 965,2540 1470,2540 1490,2560 1490,2620 1465,2645 875,2645 860,2630 860,2565
VBAT_IN on TOP "VBAT_IN_L01_P019" (solid, remove dead copper, pour order 19): 1160,705 1160,845 1210,845 1210,705
GND on TOP "GND_L01_P041" (solid, remove dead copper, pour order 41): 860,2530 3145,2530 3145,695 3960,695 3960,2625 3910,2675 860,2675
+5 on VCC "+5_L03_P060" (solid, remove dead copper, pour order 60): 580,410 445,545 445,780 400,825 100,825 55,780 55,120 115,60 1105,60 1145,100 1145,370 1105,410
GND on VCC "GND_L03_P058" (solid, remove dead copper, pour order 58): 3140,2665 3895,2665 3935,2625 3935,715 3915,695 3140,695
VBAT_OUT on VCC "VBAT_OUT_L03_P042" (solid, remove dead copper, pour order 42): 2265,2665 3070,2665 3070,695 2315,695 2265,745
VBAT_IN on VCC "VBAT_IN_L03_P057" (solid, remove dead copper, pour order 57): 870,2460 1600,2460 1625,2435 1625,845 1590,810 885,810 870,825
GND on GND "GND_L02_P049" (solid, remove dead copper, pour order 49): 805,2670 355,2670 110,2670 55,2615 55,120 115,60 1690,60 1785,155 1785,540 1725,600 1640,600 1495,745 855,745 805,795
VBAT_IN on GND "VBAT_IN_L02_P053" (solid, remove dead copper, pour order 53): 870,2385 1625,2385 1625,845 1590,810 885,810 870,825
GND on GND "GND_L02_P054" (solid, remove dead copper, pour order 54): 1937.5,540 1742.5,540 1742.5,480 1937.5,480
GND on GND "GND_L02_P035" (solid, remove dead copper, pour order 35): 1695.96,2670 3915,2670 3959.99,2625.01 3960,655 1694.03,655
GND on GND "GND_L02_P051" (solid, remove dead copper, pour order 51): 1885,2670 745,2670 745,2420 1885,2420
GND on GND "GND_L02_P050" (solid, remove dead copper, pour order 50): 1835,570 1835,155 1850,140 2030,140 2055,115 2055,65 2080,40 3900,40 3945,85 3945,610 1875,610
GND on BOT "GND_L04_P059" (solid, remove dead copper, pour order 59): 875,2675 95,2675 40,2620 45,2615 45,100 100,45 3890,45 3950,105 3950,620 1630,620 1485,765 850,765 810,805 810,2470 875,2535
VBAT_IN on BOT "VBAT_IN_L04_P056" (solid, remove dead copper, pour order 56): 870,2460 1600,2460 1625,2435 1625,845 1590,810 885,810 870,825
GND on BOT "GND_L04_P052" (solid, remove dead copper, pour order 52): 840,2675 840,2500 1710,2500 1720,2490 1745,2490 1745,2675
GND on BOT "GND_L04_P037" (solid, remove dead copper, pour order 37): 1720,655 1720,2675 3910,2675 3960,2625 3960,655 2365,655

## Other copper
TOP:
  text "1.TOP" at 75,2780.04 h200
GND:
  text "2.GND" at 1028.58,2780.04 h200
VCC:
  text "3.VCC" at 2034.53,2780.04 h200
BOT:
  text "4.BOT" at 3050,2780.04 h200

## Silkscreen, mask and mechanical layers (free items; w line width, h text height)
Top Overlay:
  circle w8: c3803.2,2583.05 r62.99
  lines w6: 1480,820 890,820 890,2405 1480.55,2405 1480.55,2293.98 1480.55,916.02 1480.55,820
  lines w8: 3365,775.2 3955.55,775.2 3955.55,2350 3365,2350 3365,775.2
  text "BAT GND" at 2600,2560.7 h150
  text "M3" at 144.53,2436.01 h50
  text "M3" at 3766.57,2436.01 h50
  text "TO MOTORS" at 2944.79,2433.59 h60
  text "V_BAT→" at 1527.05,2167.33 h80
  text "V_BAT→" at 1527.05,1790.66 h80
  text "V_BAT→" at 1527.05,1413.99 h80
  text "V_BAT→" at 1527.05,1037.33 h80
  text "RX" at 3620.91,534 h40 r90
  text "TX" at 3620.91,435.61 h40 r90
  text "+" at 713.47,346.32 h60 r270
  text "+" at 1013.47,346.32 h60 r270
  text "RESET" at 2388.44,329.06 h40
  text "GND" at 3620.94,324.78 h40 r90
  text "UART" at 3806.01,219.09 h60
  text "DIO" at 1855.07,148.59 h60
  text "CLK" at 1944.43,148.59 h60
  text "GND" at 2049.94,148.59 h60
  text "VCC" at 2156.16,148.59 h60
  text "M3" at 3446.69,78.8 h50
  text "M3" at 464.41,73.8 h50
  text "FUN" at 3703.55,54.09 h60
  text "PWR" at 2338.33,48.59 h60
  text "5V" at 1289.97,34.09 h60
Bottom Overlay:
  drawing of 53 lines, arcs and shapes, not listed
  text "by" at 488.2,2391.56 h40
  text "Designed" at 713.2,2390.1 h50
  text "Yue Wang" at 788.25,2317.27 h70
  text "UoS" at 458.16,2314.58 h50
  text "01/02/2024" at 508.2,2256.14 h40
  text "POWER" at 2360,509.61 h300
  text "Express" at 2250,371.89 h200
  text "eFuse v1.1" at 1540,350.74 h100
  text "150A" at 2440,205.74 h100
  text "Maximum Input Current" at 2195,204.9 h100
  text "Battery Voltage Monitor" at 2290,100.94 h100
  text "6S" at 2440,99.9 h100
Top Solder:
  rectangle: 890,825 1480.55,2399.8
  rectangle: 3365,780 3955.55,2354.8
  rectangle: 2315,1890 2755,2005
  rectangle: 2315,2335 2750,2450
  rectangle: 2590,885 3065,1000
  rectangle: 2590,1175 3065,1290
  rectangle: 2590,1465 3065,1580
  rectangle: 2590,1755 3065,1870
  rectangle: 2590,2045 3065,2160
  rectangle: 2590,2335 3065,2450
  rectangle: 2315,1445 2755,1560
  rectangle: 2315,1000 2750,1115
  rectangle: 2805,740 3080,2450
  rectangle: 2560,740 2755,2450
Mechanical 1:
  circle w3.94: c1185.28,1615.28 r122.05
  circle w3.94: c3660.28,1562.66 r122.05
  lines w3.94: 25,85 ccw(c85,85) 85,25 ; 25,2625 cw(c85,2625) 85,2685 ; 3900,25 ccw(c3900,85) 3960,85 ; 3900,2685 cw(c3900,2625) 3960,2625
  lines w6: 25,85 25,2625 ; 85,25 3900,25 ; 85,2685 3900,2685 ; 3960,85 3960,2625
Drill Drawing:
  text ".Legend" at 4321.9,1182.28 h118.11

## Text inside footprints (layer, text, board x,y; h text height)
D1: Top Overlay "+" at 921.21,2550 h39.37 r90
D2: Top Overlay "+" at 2536.21,2556.93 h39.37 r90
J2: Top Overlay "5264" at 3809.65,505.57 h30 r270
J5: Top Overlay "+" at 2969.88,1932.64 h118.11 r90
J6: Top Overlay "+" at 2969.88,1642.64 h118.11 r90
J8: Top Overlay "+" at 2969.88,1352.64 h118.11 r90
J9: Top Overlay "+" at 2969.88,1062.64 h118.11 r90
J11: Top Overlay "+" at 2969.88,772.64 h118.11 r90
J12: Top Overlay "+" at 2969.88,2222.64 h118.11 r90
U4: Top 3D Body "*" at 3160.84,337.5 h50 r90